# Altium PCB V2.pcbdoc
Units mil, origin at the board's own origin, x right, y up, seen from the top; angles counter-clockwise.
Board outline 2427.79 x 2060 mil, 2 copper layers (Top Layer, Bottom Layer); 55 components, 64 nets, 197 pads, 14 vias.
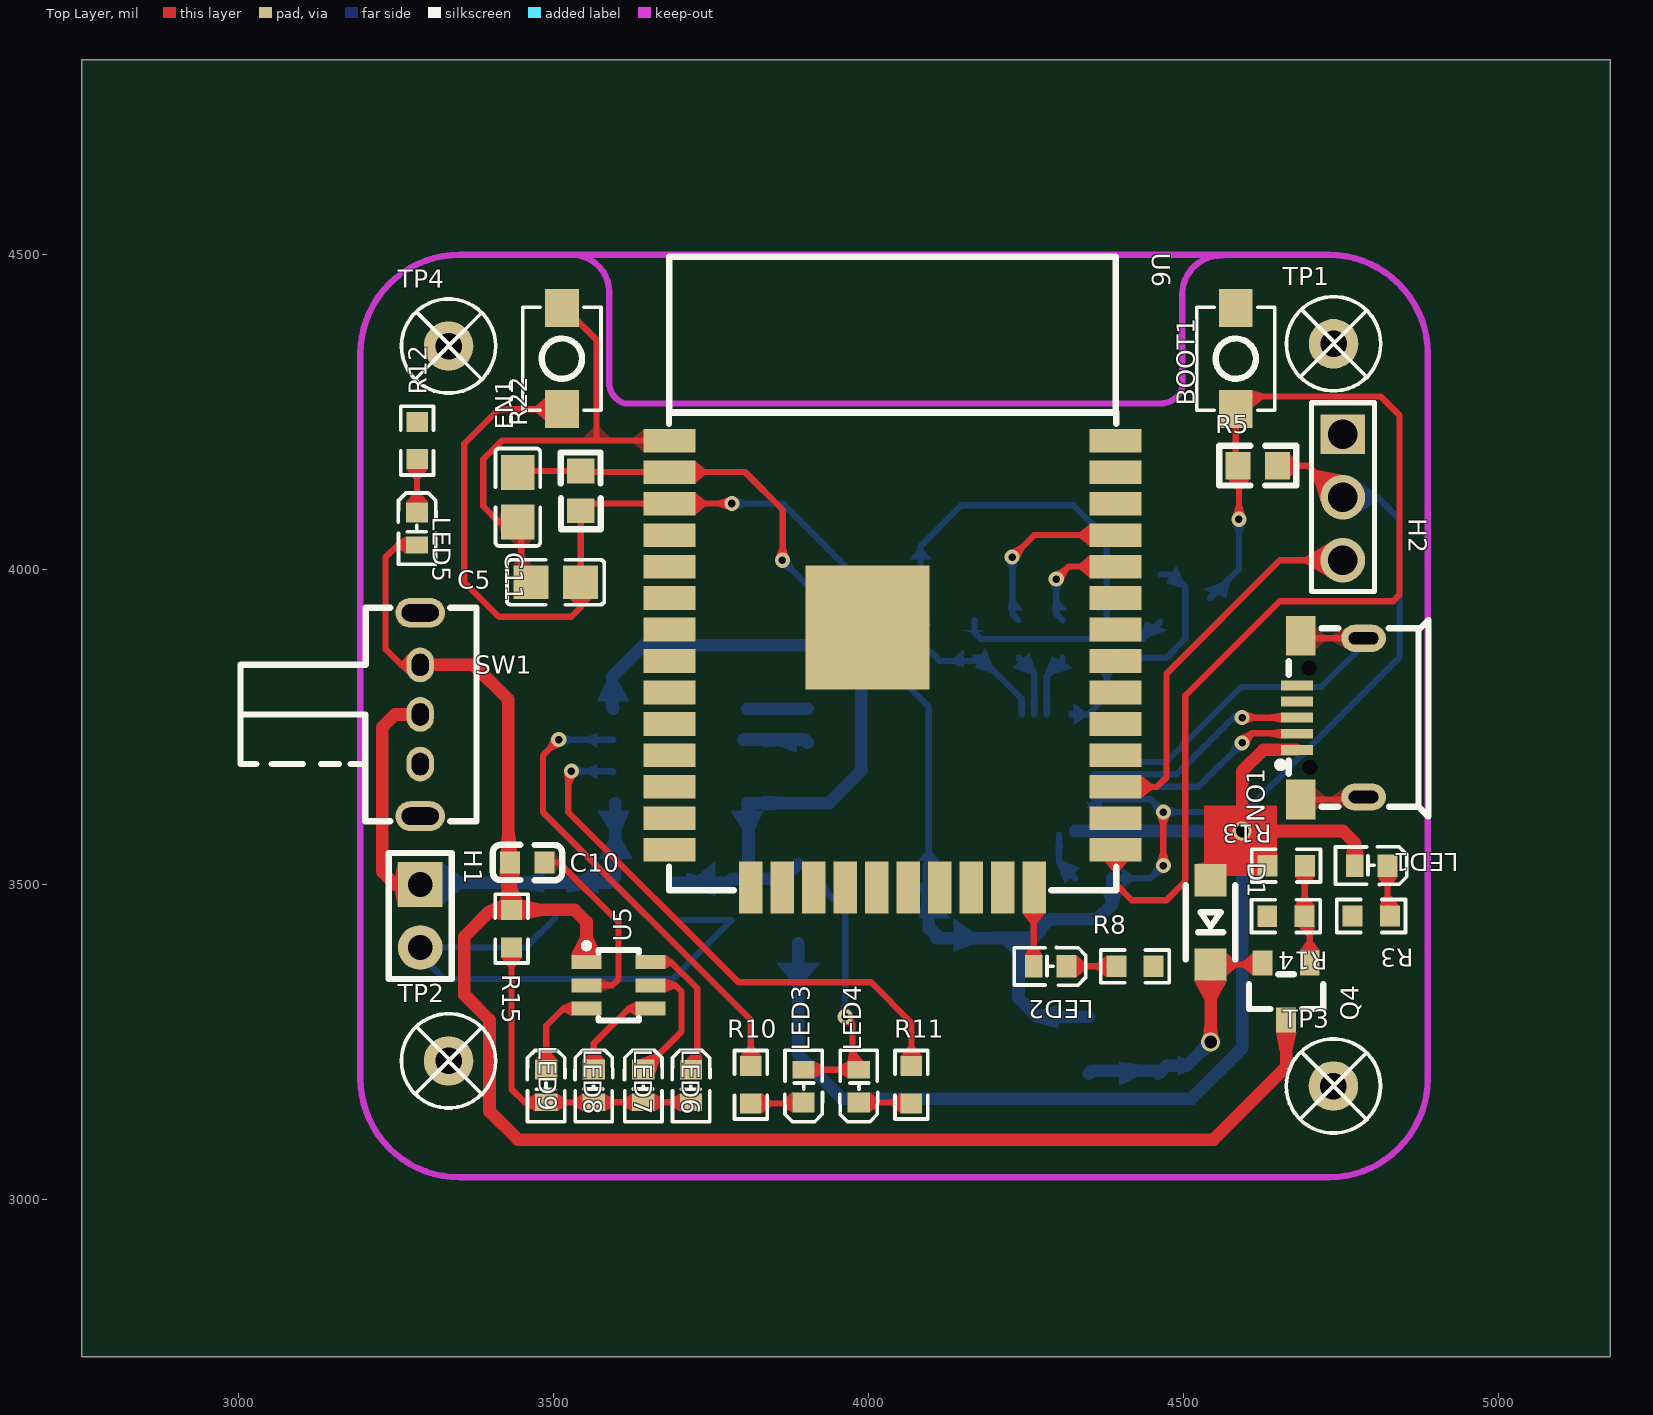
[diagram p0: Top Layer view]
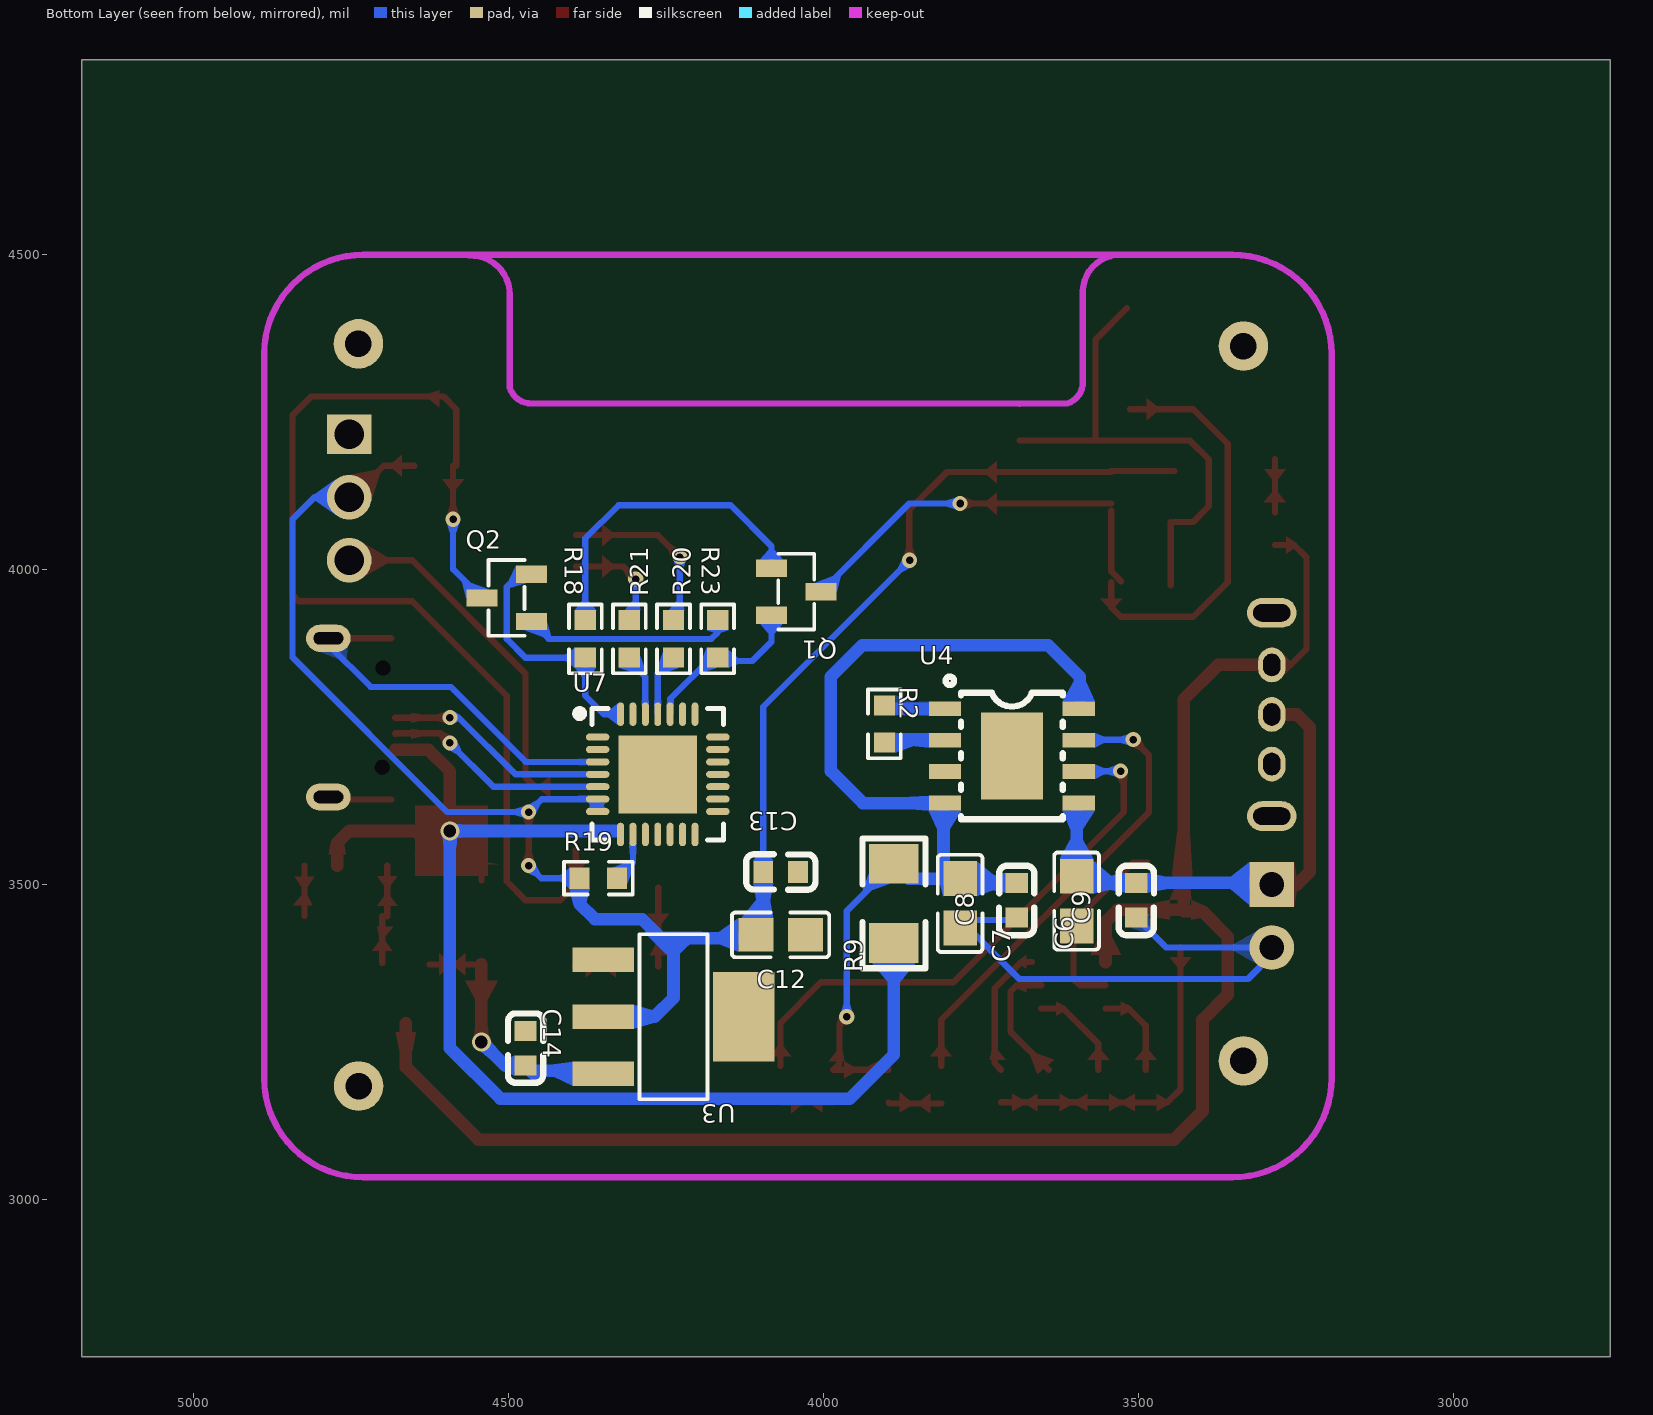
[diagram p1: Bottom Layer view, seen from below]

## Layer stack, top to bottom
Top Layer: signal copper (thickness not stored)
Dielectric: dielectric 12.6, FR-4, Dk 4.8
Bottom Layer: signal copper (thickness not stored)

## Board outline
5177.79,2750 2750,2750 2750,4810 5177.79,4810

## Components (designator, comment, footprint, x,y, rotation, side; value= is the part's Value field where it differs from the comment)
BOOT1 "TSA343G00-250J2" SW-SMD_L4.0-W2.9-LS5.0 4582.79,4335 r90 top
C5 "10uF" C0805 3502.79,3980 r0 top
C6 "104" C0603 3692.79,3475 r90 bottom
C7 "104" C0603 3502.79,3475 r90 bottom
C8 "10UF" C0805 3782.79,3470 r90 bottom
C9 "10UF" C0805 3597.79,3473.74 r90 bottom
C10 "1uF" C0603 3457.79,3535 r180 top
C11 "10uF" C0805 3442.79,4115 r270 top
C12 "10uF" C0805 4067.79,3420 r180 bottom
C13 "104" C0603 4067.79,3520 r0 bottom
C14 "104" C0603 4472.79,3240 r270 bottom
D1 "1N4148W" SOD-123FL_L2.6-W1.6-LS3.4-RD 4542.79,3440 r270 top
EN1 "TSA343G00-250J2" SW-SMD_L4.0-W2.9-LS5.0 3512.79,4335 r90 top
H1 "电源端口" HDR-TH_2P-P2.54-V-M-1 3287.79,3450 r270 top
H2 "Z-211-0311-0021-001" HDR-TH_3P-P2.54-V-M-1 4752.79,4115 r270 top
LED1 "LED-0603_R" LED0603-R-RD_BLUE-A 4797.79,3530 r180 top
LED2 "VLMTG1401-GS08" LED0603-R-RD_BLUE-A 4287.79,3370 r180 top
LED3 "红色" LED0603-R-RD_BLUE-A 3896.48,3180 r90 top
LED4 "绿色" LED0603-R-RD_BLUE-A 3984.11,3180 r90 top
LED5 "LED-0603_R" LED0603-R-RD_BLUE-A 3282.79,4065 r270 top
LED6 "LED-0603_R" LED0603-R-RD_BLUE-A 3717.79,3180 r270 top
LED7 "LED-0603_R" LED0603-R-RD_BLUE-A 3642.16,3180.05 r270 top
LED8 "LED-0603_R" LED0603-R-RD_BLUE-A 3563.41,3180.05 r270 top
LED9 "LED-0603_R" LED0603-R-RD_BLUE-A 3487.79,3180 r270 top
NO1 "MICROUSB-5PIN" USB-SMD_5P_MICROUSB-5PIN 4732.79,3765 r90 top
Q1 "S8050" SOT-23-3_L2.9-W1.3-P1.90-LS2.4-BR 4042.79,3965 r0 bottom
Q2 "S8050" SOT-23-3_L2.9-W1.3-P1.90-LS2.4-BR 4502.79,3955 r180 bottom
Q4 "AO3401A_P" AO3401A_SOT-23-3 4662.79,3330 r90 top
R2 "1.2K" R0603#1 3902.79,3755 r270 bottom
R3 "ERA3VEB1001V" R0603#1 4797.79,3450 r180 top
R5 "10k" R0603#2 4617.79,4165 r0 top
R8 "ERA3VEB1001V" R0603#1 4422.79,3370 r0 top
R9 "250mR" R1206_1 3887.79,3470 r90 bottom
R10 "2K" R0603#1 3812.79,3182.06 r270 top
R11 "10k" R0603#1 4067.79,3182.06 r270 top
R12 "ERA3VEB1001V" R0603#1 3282.79,4205 r90 top
R13 "1k" R0603#1 4662.79,3530 r0 top
R14 "1k" R0603#1 4662.45,3449.66 r180 top
R15 "330" R0603#1 3432.79,3430 r270 top
R18 "ERJPB3B1002V" R0603#1 4377.79,3890 r270 bottom
R19 "TNPW06034K70BEEA" R0603#1 4357.11,3510 r180 bottom
R20 "ERA3VEB1001V" R0603#1 4237.79,3890 r90 bottom
R21 "ERA3VEB1001V" R0603#1 4307.79,3890 r90 bottom
R22 "10k" R0603#2 3542.79,4125 r90 top
R23 "ERJPB3B1002V" R0603#1 4167.79,3890 r270 bottom
SW1 "SK-12D02-VG5_C136722" SW-TH_SK-12D02-VG5 3287.79,3770 r270 top
TP1 "M2螺丝" M2螺丝 4738.07,4358.59 r0 top
TP2 "M2螺丝" M2螺丝 3332.79,3220 r0 top
TP3 "M2螺丝" M2螺丝 4737.79,3180 r0 top
TP4 "M2螺丝" M2螺丝 3332.79,4355 r0 top
U3 "AMS1117-3.3_C347256" SOT-223-4_L6.5-W3.5-P2.30-LS7.0-BR 4237.79,3290 r0 bottom
U4 "TP4056D" ESOP-8_L4.9-W3.9-P1.27-LS6.0-TL-EP 3700.55,3704.18 r180 bottom
U5 "HM1160" SOT23-6 3602.79,3340 r270 top
U6 "ESP32-WROOM-32D-N4_C473012" WIFIM-SMD_39P-L25.5-W18.0-P1.27-BL 4037.79,3850 r270 top
U7 "CP2102" QFN-28_L5.0-W5.0-P0.50-TL-EP3.2 4262.79,3675 r180 bottom

## Footprints (in the part's own frame and the unit in brackets; to place one, negate y for a bottom-side part, rotate by r counter-clockwise, add the part's x,y. Pads: shape width x height; smd on the part's side, far side on the other; paste and mask are expansions set on the pad)
AO3401A_SOT-23-3 [mm]
  rect 1x0.8 smd paste+0 mask+0.051: 1(1.15,-0.95) 2(1.15,0.95) 3(-1.15,0)
  silkscreen extent -0.7,-1.5 0.7,1.5
C0603 [mm]
  rect 0.8x0.9 smd paste+0 mask+0.051: 1(-0.7,0) 2(0.7,0)
  silkscreen extent -1.41,-0.71 1.39,0.72
C0805 [mm]
  rect 1.41x1.35 smd paste-100 mask+0.051: 1(-1,0) 2(1,0)
  silkscreen extent -1.96,-0.9 1.96,0.9
ESOP-8_L4.9-W3.9-P1.27-LS6.0-TL-EP [mm]
  rect 1.3x0.6 smd paste+0 mask+0.051: 1(-2.7,1.905) 2(-2.7,0.635) 3(-2.7,-0.635) 4(-2.7,-1.905) 5(2.7,-1.905) 6(2.7,-0.635) 7(2.7,0.635) 8(2.7,1.905)
  rect 2.5x3.5 smd paste+0 mask+0.051: 9(0,0)
  silkscreen extent -2.67,-2.55 2.05,3.2
HDR-TH_2P-P2.54-V-M-1 [mm]
  rect 1.8x1.8 hole 1 paste+0 mask+0.051: 1(-1.27,0)
  round 1.8 hole 1 paste+0 mask+0.051: 2(1.27,0)
  silkscreen extent -2.54,-1.27 2.54,1.27
HDR-TH_3P-P2.54-V-M-1 [mm]
  rect 1.575x1.8 hole 1.2 paste+0 mask+0.051: 1(-2.54,0)
  round 1.8 hole 1.2 paste+0 mask+0.051: 2(0,0) 3(2.54,0)
  silkscreen extent -3.81,-1.27 3.81,1.27
LED0603-R-RD_BLUE-A [mm]
  rect 0.7x0.9 smd paste+0 mask+0.051: 1(0.66,0)
  rect 0.8x0.9 smd paste+0 mask+0.051: 2(-0.66,0)
  silkscreen extent -1.44,-0.76 1.44,0.76
M2螺丝 [mm]
  round 2 hole 1.07 mask+0.051: 1(0,0)
  silkscreen extent -1.9,-1.9 1.9,1.9
QFN-28_L5.0-W5.0-P0.50-TL-EP3.2 [mm]
  oval 0.95x0.28 smd paste-100 mask+0.051: 1(-2.425,1.501) 2(-2.425,1.001) 3(-2.425,0.501) 4(-2.425,0) 5(-2.425,-0.5) 6(-2.425,-1.001) 7(-2.425,-1.501) 15(2.425,-1.501) 16(2.425,-1.001) 17(2.425,-0.5) 18(2.425,0) 19(2.425,0.501) 20(2.425,1.001) 21(2.425,1.501)
  oval 0.28x0.95 smd paste-100 mask+0.051: 8(-1.501,-2.425) 9(-1.001,-2.425) 10(-0.501,-2.425) 11(0,-2.425) 12(0.5,-2.425) 13(1.001,-2.425) 14(1.501,-2.425) 22(1.501,2.425) 23(1.001,2.425) 24(0.5,2.425) 25(0,2.425) 26(-0.501,2.425) 27(-1.001,2.425) 28(-1.501,2.425)
  rect 3.15x3.15 smd paste-100 mask+0.051: 29(0,0)
  silkscreen extent -3.3,-2.65 2.65,2.65
R0603#1 [mil]
  rect 31.75x34.02 smd paste-3937.01 mask+2: 1(-29.66,0) 2(29.66,0)
  silkscreen extent -55,-26 55,26
R0603#2 [mil]
  rect 39.37x43.31 smd paste+0 mask+4: 1(-31.49,0) 2(31.5,0)
  silkscreen extent -61,-31 61,32
R1206_1 [mil]
  rect 63x78.74 smd paste+0 mask+1.97: 1(-62.99,0) 2(62.99,0)
  silkscreen extent -103,-50 103,50
SOD-123FL_L2.6-W1.6-LS3.4-RD [mm]
  rect 1.3x1.3 smd paste+0 mask+0.051: 1(1.7,0) 2(-1.7,0)
  silkscreen extent -1.5,-1 1.5,1
SOT23-6 [mil]
  rect 22.2x47.7 smd paste+0 mask+2: 1(-37,-51) 2(0,-51) 3(37,-51) 4(37,51) 5(0,51) 6(-37,51)
  silkscreen extent -67,-55 56,32
SOT-23-3_L2.9-W1.3-P1.90-LS2.4-BR [mm]
  rect 1.25x0.7 smd paste+0 mask+0.051: 1(1,-0.95) 2(1,0.95) 3(-1,0)
  silkscreen extent -0.73,-1.53 0.73,1.53
SOT-223-4_L6.5-W3.5-P2.30-LS7.0-BR [mm]
  rect 2.47x0.98 smd paste+0 mask+0.051: 1(2.835,-2.3) 2(2.835,0) 3(2.835,2.3)
  rect 2.47x3.6 smd paste+0 mask+0.051: 4(-2.835,0)
  silkscreen extent -1.37,-3.33 1.37,3.33
SW-SMD_L4.0-W2.9-LS5.0 [mm]
  rect 1.53x1.36 smd paste+0 mask+0.051: 1(-2.035,0) 2(2.035,0)
  silkscreen extent -2.08,-1.58 2.08,1.58
SW-TH_SK-12D02-VG5 [mm]
  oval 1.4x1.1 hole 0.7 slot 0.9 at 0 deg copper offset 0.001,0 paste+0 mask+0.051: 1(-2,-0.001)
  oval 1.4x1.1 hole 0.7 slot 0.9 at 0 deg paste+0 mask+0.051: 2(0,0)
  oval 1.4x1.1 hole 0.7 slot 0.9 at 0 deg copper offset -0.001,0 paste+0 mask+0.051: 3(2,0.001)
  oval 1.2x2 hole 0.7 slot 1.5 at 90 deg copper offset 0,-0.001 paste+0 mask+0.051: 4(4.099,0)
  oval 1.2x2 hole 0.7 slot 1.5 at 90 deg copper offset 0,0 paste+0 mask+0.051: 5(-4.1,0)
  silkscreen extent -4.3,-7.25 4.3,2.27
USB-SMD_5P_MICROUSB-5PIN [mm]
  rect 0.4x1.3 smd paste-100 mask+0.05: 1(-1.3,1.345) 2(-0.65,1.345) 3(0,1.345) 4(0.65,1.345) 5(1.3,1.345)
  rect 1.6x1.2 smd paste-100 mask+0.05: 6(3.3,1.185) 7(-3.3,1.185)
  oval 1.1x1.8 hole 0.5 slot 1.2 at 90 deg paste+0 mask+0.05: 8(3.2,-1.345) 9(-3.2,-1.345)
  Multi-Layer board cut-out: 2,0.555 2.13,0.585 2.235,0.668 2.292,0.788 2.292,0.922 2.235,1.042 2.13,1.125 2,1.155 2,1.155 1.87,1.125 1.765,1.042 1.708,0.922 1.708,0.788 1.765,0.668 1.87,0.585 2,0.555
  Multi-Layer board cut-out: -2,0.525 -1.87,0.555 -1.765,0.638 -1.708,0.758 -1.708,0.892 -1.765,1.012 -1.87,1.095 -2,1.125 -2,1.125 -2.13,1.095 -2.235,1.012 -2.292,0.892 -2.292,0.758 -2.235,0.638 -2.13,0.555 -2,0.525
  silkscreen extent -3.99,-3.96 3.93,2.14
WIFIM-SMD_39P-L25.5-W18.0-P1.27-BL [mm]
  rect 0.95x2.1 smd paste+0 mask+0.051: 1(-9.015,-9) 2(-7.745,-9) 3(-6.475,-9) 4(-5.205,-9) 5(-3.935,-9) 6(-2.665,-9) 7(-1.395,-9) 8(-0.125,-9) 9(1.145,-9) 10(2.415,-9) 11(3.685,-9) 12(4.955,-9) 13(6.225,-9) 14(7.495,-9) 25(7.495,9) 26(6.225,9) 27(4.955,9) 28(3.685,9) 29(2.415,9) 30(1.145,9) 31(-0.125,9) 32(-1.395,9) 33(-2.665,9) 34(-3.935,9) 35(-5.205,9) 36(-6.475,9) 37(-7.745,9) 38(-9.015,9)
  rect 2.1x0.95 smd paste+0 mask+0.051: 15(9.015,-5.715) 16(9.015,-4.445) 17(9.015,-3.175) 18(9.015,-1.905) 19(9.015,-0.635) 20(9.015,0.635) 21(9.015,1.905) 22(9.015,3.175) 23(9.015,4.445) 24(9.015,5.715)
  rect 5x5 smd paste+0 mask+0.051: 39(-1.472,-1.017)
  silkscreen extent -16.44,-9.02 9.12,9.02

## Via types
v1: diameter 24, hole 12, Top Layer to Bottom Layer, 10 vias
v2: diameter 24.02, hole 12.01, Top Layer to Bottom Layer, 2 vias
v3: diameter 30, hole 20, Top Layer to Bottom Layer, 2 vias

## Nets (pads, with @x,y where several pads share a name; then routed paths per layer and width w, separated by ;. In a path a pad name is that pad's centre, name@x,y a point inside that pad or via, vN(x,y) a via of type N, cw(c..) or ccw(c..) an arc to the next point about the centre after c; other vN are vias at no path point)
3V3: C11.1 C12.1 C13.2 H2.2 R5.2 R19.1 R22.2 U3.2 U6.2 U7.6 U7.7 | length 3011.6
  Top Layer w10: C11.1@3442.79,4156.5 R22.2 ; R22.2@3542.79,4154.93 U6.2 ; U6.2@3683.47,4155 3803.47,4155 3863.47,4095 3863.47,4015.68 v1(3862.79,4015) ; v1(4467.79,3530) v1(4467.79,3615) ; R5.2 4697.79,4165 H2.2@4747.79,4115
  Bottom Layer w10: v1(3862.79,4015) 4095.35,3782.44 C13.2@4095.35,3530 ; U7.6 U7.6@4363.27,3635.61 ; U7.7@4363.27,3615.91 U7.6@4363.27,3635.61 ; R19.1 4447.79,3510 v1(4467.79,3530) ; H2.2 4807.79,4115 4842.79,4080 4842.79,3860.98 4596.81,3615 v1(4467.79,3615) 4447.19,3635.61 U7.6@4363.27,3635.61
  Bottom Layer w20: C12.1@4095.35,3430 C13.2 C13.2@4095.35,3530 ; C12.1@4097.16,3430 C12.1 ; C12.1@4107.16,3415 4217.79,3415 4237.79,3395 ; U3.2 4267.79,3290 4237.79,3320 4237.79,3395 ; R19.1 4386.77,3468.98 4362.79,3445 4287.79,3445 4237.79,3395
$2N349: R2.2 U4.2 | length 103
  Bottom Layer w20: U4.2@3801.84,3730.34 3897.79,3730.34 R2.2
$2N379: R10.1 U4.7 | length 751.8
  Top Layer w10: v1(3507.79,3730) 3482.79,3705 3482.79,3615 3812.79,3285 R10.1
  Bottom Layer w10: v1(3507.79,3730) U4.7@3594.25,3730
$2N380: R11.1 U4.6 | length 886.3
  Top Layer w10: v1(3527.79,3680) 3522.79,3675 3522.79,3615 3793.2,3344.6 4003.78,3344.6 4067.79,3280.59 R11.1
  Bottom Layer w10: v1(3527.79,3680) 3593.43,3680 U4.6
$2N662: Q4.1 R13.2 R14.1 | length 154.7
  Top Layer w10: R14.1@4692.45,3449.66 R13.2 ; Q4.1 R14.1@4700.19,3449.66
$2N691: LED9.2 U5.3 | length 145.2
  Top Layer w10: LED9.2 3487.79,3275.99 3514.8,3303 U5.3
$2N692: LED8.2 U5.4 | length 154.9
  Top Layer w10: LED8.2 3563.41,3247.62 3618.79,3303 U5.4
$2N693: LED7.2 U5.5 | length 202.2
  Top Layer w10: LED7.2 3702.79,3266.67 3702.79,3330 3692.8,3340 U5.5
$2N694: LED6.2 U5.6 | length 209.6
  Top Layer w10: U5.6@3668.79,3377 3685.8,3377 3727.79,3335 3727.79,3215.99 LED6.2
$2N695: LED6.1 LED7.1 LED8.1 LED9.1 R15.2 | length 519
  Top Layer w10: R15.2 3432.79,3175 3453.78,3154.01 LED9.1 LED8.1@3563.41,3154.01 ; LED8.1 LED7.1 LED6.1@3717.79,3154.07
$2N937: LED3.2 R10.2 | length 84.4
  Top Layer w10: R10.2 3894.86,3152.4 LED3.2
$2N938: LED4.2 R11.2 | length 83.7
  Top Layer w10: LED4.2 R11.2@4067.79,3154.01
$2N941: LED5.2 R12.1 | length 84.4
  Top Layer w10: LED5.2 R12.1
$2N949: Q1.1 R18.1 | length 509.4
  Bottom Layer w10: Q1.1 4082.16,4037.4 4147.16,4102.4 4325.05,4102.4 4377.79,4049.66 R18.1
$2N2531: LED2.2 R8.1 | length 79.4
  Top Layer w10: LED2.2 R8.1
$2N2543: LED1.2 R3.1 | length 80
  Top Layer w10: R3.1@4823.78,3450 LED1.2
$2N14500: R19.2 U7.9 | length 80
  Bottom Layer w10: U7.9 4302.2,3535.26 R19.2
$2N14521: R20.1 U7.25 | length 100.2
  Bottom Layer w10: R20.1 4262.8,3835.34 U7.25
$2N14556: R21.1 U7.26 | length 100.2
  Bottom Layer w10: U7.26@4282.79,3770.47 4282.79,3830 4307.79,3855 R21.1
$2N29907: Q2.1 R23.1 | length 330.9
  Bottom Layer w10: R23.1 4167.79,3900 4177.79,3890 4435.82,3890 Q2.1
+5V: D1.2 LED1.1 NO1.1 R9.1 R13.1 U7.8 | length 2168.3
  Top Layer w10: D1.2 D1.2@4542.79,3530
  Top Layer w20: NO1.1 4626.61,3713.82 4592.79,3680 v3(4592.79,3585) 4542.79,3535 4542.79,3530 R13.1 4633.13,3570.34 4647.79,3585 4752.79,3585 4771.81,3565.99 LED1.1
  Bottom Layer w20: R9.1 3887.79,3230 3957.79,3160 4512.79,3160 4592.79,3240 v3(4592.79,3585) 4327.79,3585
CLK: U6.20
CMD: U6.19
D+: NO1.3 U7.4 | length 358.9
  Top Layer w10: v2(4592.79,3765) NO1.3
  Bottom Layer w10: U7.4 4488.65,3675 4578.65,3765 v2(4592.79,3765)
D-: NO1.2 U7.5 | length 357.2
  Top Layer w10: v2(4592.79,3725) 4607.79,3740 4679.25,3740 NO1.2
  Bottom Layer w10: U7.5 4523.69,3655.3 4592.79,3724.41 v2(4592.79,3725)
DTR: Q2.2 R18.2 U7.28 | length 396
  Bottom Layer w10: U7.28 4348.27,3770.47 4377.79,3800 4377.79,3860 4472.79,3860 4502.79,3890 4502.79,3973.03 4483.42,3992.4 Q2.2
EN: C5.2 EN1.1 Q1.3 R22.1 U6.3 | length 1288.8
  Top Layer w10: EN1.1 3412.67,4254.88 3357.79,4200 3357.79,3980 3412.79,3925 3527.79,3925 3542.79,3940 C5.2@3542.79,3980 ; C5.2@3527.16,3981.55 3542.79,3997.18 R22.1 ; R22.1@3542.79,4104.93 U6.3 3782.72,4104.93 v1(3782.79,4105)
  Bottom Layer w10: v1(3782.79,4105) 3863.42,4105 Q1.3
GND: BOOT1.2 C5.1 C6.1 C7.1 C8.1 C9.1 C10.1 C11.2 C12.2 C13.1 C14.1 EN1.2 H1.2 H2.1 NO1.5 NO1.6 NO1.7 NO1.8 NO1.9 R2.1 R3.2 R8.2 R12.2 R14.2 U3.1 U4.1 U4.3 U4.9 U5.2 U6.1 U6.15 U6.38 U6.39 U7.3 | length 2896.9
  Top Layer w10: C11.2 3412.79,4075.63 3387.79,4100.63 3387.79,4175 3417.72,4204.93 U6.1 ; C5.1@3448.42,3975 C11.2@3448.42,4075.63 ; C10.1 3507.79,3535 3602.79,3440 3602.79,3350 3592.79,3340 U5.2 ; EN1.2@3517.79,4415.12 3567.79,4365.12 3567.79,4204.93 U6.1@3688.47,4204.93 ; NO1.7 NO1.9@4785.74,3635.08 ; NO1.6@4686.14,3890.99 NO1.8
  Bottom Layer w10: C7.1 3455.35,3400 H1.2 3287.79,3387.73 3325.52,3350 3688.99,3350 3782.79,3443.8 C6.1@3693.99,3443.8 ; U7.3 4472.5,3694.7 4591.56,3813.77 4718.52,3813.77 4785.74,3880.99 NO1.8
  Bottom Layer w20: U4.1 R2.1@3902.79,3779.18
IO0: BOOT1.1 Q2.3 R5.1 U6.25 | length 1773.5
  Top Layer w10: U6.25@4392.79,3554.93 4392.79,3500 4417.79,3475 4472.79,3475 4502.79,3505 4502.79,3800 4652.79,3950 4832.79,3950 4842.79,3960 4842.79,4245 4812.79,4275 4602.91,4275 BOOT1.1 R5.1@4582.79,4165 ; v1(4587.79,4080) R5.1@4587.79,4165
  Bottom Layer w10: Q2.3 4587.79,4000.63 v1(4587.79,4080)
IO2: LED2.1 U6.24 | length 125.1
  Top Layer w10: LED2.1 U6.24@4261.81,3495.09
IO4: U6.26
IO5: U6.29
IO12: U6.14
IO13: U6.16
IO14: U6.13
IO15: U6.23
IO16: H2.3 U6.27 | length 606.4
  Top Layer w10: U6.27@4392.12,3655 4457.79,3655 4472.79,3670 4472.79,3835 4652.79,4015 H2.3
IO17: U6.28
IO18: U6.30
IO19: U6.31
IO21: U6.33
IO22: U6.36
IO23: U6.37
IO25: U6.10
IO26: U6.11
IO27: U6.12
IO32: U6.8
IO33: U6.9
IO34: U6.6
IO35: U6.7
RTS: Q1.2 R23.2 U7.24 | length 266.9
  Bottom Layer w10: Q1.2 4082.16,3885.63 4112.79,3855 R23.2@4167.79,3855 ; R23.2 4177.45,3860.34 4242.79,3795 U7.24@4242.79,3770.47
RXD0: R21.2 U6.34 | length 172.1
  Top Layer w10: v1(4297.79,3985) 4317.79,4005 4392.04,4005 U6.34
  Bottom Layer w10: v1(4297.79,3985) 4297.79,3929.66 R21.2
SD0: U6.21
SD1: U6.22
SD2: U6.17
SD3: U6.18
TXD0: R20.2 U6.35 | length 283.3
  Top Layer w10: v1(4227.79,4020) 4262.72,4054.93 U6.35
  Bottom Layer w10: v1(4227.79,4020) 4227.79,3929.66 R20.2
VCC4: C6.2 C8.2 LED3.1 LED4.1 R9.2 U4.4 U4.8 | length 1625.9
  Top Layer w10: LED3.1 LED4.1 3974.11,3215.99 3974.11,3278.68 v1(3962.79,3290)
  Bottom Layer w10: R9.2 3962.79,3457.99 v1(3962.79,3290)
  Bottom Layer w20: U4.8 3592.79,3780.64 3592.79,3830 3642.79,3880 3937.79,3880 3987.79,3830 3987.79,3680 3936.97,3629.18 U4.4@3814,3629.18 ; C6.2 3775.98,3502.56 C8.2 3814,3509.37 ; U4.4 U4.4@3814,3629.18 ; R9.2 3864.17,3509.37 3814,3509.37 ; 3814,3509.37 3809,3514.37 3809,3624.18 U4.4@3814,3629.18
VCCBAT: C10.2 LED5.1 Q4.3 R15.1 SW1.1 U5.1 | length 2746.4
  Top Layer w10: LED5.1 3251.81,4039.01 3232.79,4020 3232.79,3873.74 3257.79,3848.74 SW1.1
  Top Layer w20: SW1.1 3372.79,3848.74 3427.79,3793.74 R15.1@3427.79,3457.56 ; U5.1 3551.79,3440.66 3532.79,3459.66 3502.79,3459.66 3429.89,3459.66 R15.1@3427.79,3457.56 ; Q4.3@4662.79,3279.72 4662.79,3210 4547.79,3095 3442.79,3095 3397.79,3140 3397.79,3285 3357.79,3325 3357.79,3417.28 3398.07,3457.56 R15.1@3427.79,3457.56
VCCCHARGE: C7.2 C9.2 H1.1 SW1.2 U4.5 | length 797
  Top Layer w20: H1.1 3247.79,3500 3227.79,3520 3227.79,3750 3247.78,3769.99 SW1.2
  Bottom Layer w20: H1.1@3287.79,3502.56 C7.2 3587.24,3502.56 C9.2 U4.5@3597.79,3629.18
VCCIN: C14.2 D1.1 Q4.2 U3.3 | length 424.1
  Top Layer w10: D1.1 Q4.2@4625.39,3373.07
  Top Layer w20: v3(4542.79,3250) D1.1
  Bottom Layer w20: U3.3 4354.4,3204.45 4454.8,3204.45 4459.8,3199.45 C14.2 4505.23,3212.44 v3(4542.79,3250)
VN: U6.5
VP: U6.4
"": NO1.4 SW1.3 SW1.4 SW1.5 TP1.1 TP2.1 TP3.1 TP4.1 U3.4 U6.32 U7.1 U7.2 U7.10 U7.11 U7.12 U7.13 U7.14 U7.15 U7.16 U7.17 U7.18 U7.19 U7.20 U7.21 U7.22 U7.23 U7.27 U7.29

## Polygon pours and split planes (outlines as drawn)
GND on Top Layer (solid, remove dead copper, pour order 0): 3127.79,3000 4927.79,3000 4927.79,4560 3127.79,4560
GND on Bottom Layer (solid, remove dead copper, pour order 1): 3127.79,3000 4927.79,3000 4927.79,4560 3127.79,4560

## Keep-outs
Board Outline Layer:
  lines w10 net "": 3527.79,4500 cw(c3528.12,4440.11) 3587.79,4435 ; 3587.79,4292.86 3587.79,4431.43 ; 3587.8,4298.7 ccw(c3623.63,4297.86) 3612.8,4263.7 ; 3688.46,4263.24 3688.93,4263.71 ; 4497.8,4436.32 cw(c4559.56,4437.02) 4562.8,4498.71 ; 4497.8,4438.71 4497.8,4288.71 cw(c4463.63,4299.54) 4462.8,4263.71 3688.93,4263.71 ; 3612.8,4263.7 3612.81,4263.71 ; 3612.81,4263.71 3688.93,4263.71 ; 3192.79,3192.48 ccw(c3350.27,3192.48) 3350.27,3035 4730.31,3035 ccw(c4730.31,3192.48) 4887.79,3192.48 4887.79,4342.52 ccw(c4730.31,4342.52) 4730.31,4500 3350.27,4500 ccw(c3350.27,4342.52) 3192.79,4342.52 3192.79,3192.48

## Other copper
Top Layer:
  region net +5V: 4532.79,3514.25 4647.49,3514.25 4647.49,3625.05 4532.79,3625.05
  region net +5V: 4781.81,3565.99 4761.81,3565.99 4758.03,3547.72 4785.59,3547.72
  region net $2N2543: 4828.78,3497.28 4839.52,3512.28 4808.03,3512.28 4818.78,3497.28
  region net IO2: 4256.81,3402.72 4248.03,3387.72 4275.59,3387.72 4266.81,3402.72
  region net $2N2531: 4344.52,3365 4344.52,3375 4329.52,3387.5 4329.52,3352.5
  region net 3V3: 4683.97,4160 4683.97,4170 4668.97,4182.5 4668.97,4147.5
  region net IO0: 4582.79,4128.35 4592.79,4128.35 4605.29,4143.35 4570.29,4143.35
  region net EN: 3537.79,3940 3547.79,3940 3560.29,3953.43 3525.29,3953.43
  region net D+: 4639.25,3770 4639.25,3760 4654.25,3757.13 4654.25,3772.87
  region net D-: 4639.25,3745 4639.25,3735 4654.25,3731.54 4654.25,3747.28
  region net $2N937: 3844.8,3147.4 3844.8,3157.4 3829.8,3168.28 3829.8,3136.52
  region net $2N379: 3807.79,3242.6 3795.78,3227.6 3829.8,3227.6 3817.79,3242.6
  region net VCC4: 3929.19,3210.99 3914.19,3219.76 3914.19,3192.21 3929.19,3200.99
  region net $2N937: 3863.76,3147.4 3878.76,3138.27 3878.76,3169.76 3863.76,3157.4
  region net $2N938: 4035.78,3159.01 4035.78,3149.01 4050.78,3136.52 4050.78,3168.28
  region net $2N380: 4062.79,3242.6 4050.78,3227.6 4084.8,3227.6 4072.79,3242.6
  region net VCC4: 3951.39,3210.99 3951.39,3200.99 3966.39,3192.21 3966.39,3219.76
  region net VCC4: 3979.11,3234.76 3969.11,3234.76 3966.39,3219.76 3991.61,3219.76
  region net $2N938: 4016.82,3159.01 4001.82,3169.76 4001.82,3138.27 4016.82,3149.01
  region net VCCCHARGE: 3247.79,3510 3247.79,3490 3252.36,3465 3252.36,3535
  region net $2N941: 3277.79,4144.46 3287.79,4144.46 3299.8,4159.46 3265.78,4159.46
  region net VCCBAT: 3251.81,4044.01 3251.81,4034.01 3265.08,4025.24 3265.08,4052.79
  region net $2N941: 3277.79,4121.73 3265.29,4106.73 3300.29,4106.73 3287.79,4121.73
  region net +5V: 4552.79,3535 4532.79,3535 4517.2,3532.52 4568.38,3532.52
  region net VCCIN: 4552.79,3317.48 4568.38,3347.48 4517.2,3347.48 4532.79,3317.48
  region net VCCIN: 4583.38,3378.07 4568.38,3390.57 4568.38,3355.57 4583.38,3368.07
  region net $2N662: 4697.45,3497.99 4708.33,3512.99 4676.58,3512.99 4687.45,3497.99
  region net +5V: 4587.26,3520 4617.26,3512.99 4617.26,3547.01 4587.26,3540
  region net +5V: 4623.13,3570.34 4617.26,3547.01 4649.01,3547.01 4643.13,3570.34
  region net $2N662: 4697.45,3481.67 4687.45,3481.67 4676.24,3466.67 4707.99,3466.67
  region net $2N662: 4695.19,3417.65 4705.19,3417.65 4707.99,3432.65 4682.69,3432.65
  region net VCCBAT: 3437.79,3582.72 3417.79,3582.72 3414.48,3517.28 3445.98,3517.28
  region net VCCBAT: 3437.79,3487.28 3445.98,3517.28 3414.48,3517.28 3417.79,3487.28
  region net VCCBAT: 3561.79,3418.1 3541.79,3418.1 3527.94,3388.1 3575.64,3388.1
  region net $2N691: 3514.8,3308 3514.8,3298 3527.94,3291.9 3527.94,3314.1
  region net $2N692: 3618.79,3298 3629.94,3291.9 3629.94,3314.1 3618.79,3308
  region net $2N694: 3685.8,3372 3685.8,3382 3677.64,3388.1 3677.64,3365.9
  region net $2N693: 3692.64,3335 3692.64,3345 3677.64,3351.1 3677.64,3328.9
  region net $2N695: 3437.79,3369.46 3449.8,3384.46 3415.78,3384.46 3427.79,3369.46
  region net VCCBAT: 3437.79,3505.54 3417.79,3505.54 3415.78,3475.54 3449.8,3475.54
  region net VCCBAT: 3479.8,3449.66 3479.8,3469.66 3449.8,3475.54 3449.8,3443.78
  region net VCCBAT: 3398.07,3467.56 3398.07,3447.56 3415.78,3443.78 3415.78,3475.54
  region net IO16: 4729.35,4041.57 4692.55,4020 4692.55,4010 4729.35,3988.43
  region net 3V3: 4751.47,4150.41 4710.92,4158.95 4704.55,4151.17 4717.83,4109.26
  region net $2N695: 3685.08,3159.07 3685.08,3149.07 3700.08,3140.24 3700.08,3167.79
  region net $2N694: 3722.79,3236.73 3710.29,3221.73 3735.51,3221.73 3732.79,3236.73
  region net $2N695: 3674.87,3159.07 3659.87,3167.85 3659.87,3140.29 3674.87,3149.07
  region net $2N695: 3609.44,3159.07 3609.44,3149.07 3624.44,3140.29 3624.44,3167.85
  region net $2N693: 3661.44,3232.39 3633.15,3221.79 3659.87,3199 3670.48,3227.29
  region net $2N695: 3530.7,3159.01 3530.7,3149.01 3545.7,3140.29 3545.7,3167.85
  region net $2N695: 3596.13,3159.07 3581.13,3167.85 3581.13,3140.29 3596.13,3149.07
  region net $2N692: 3568.41,3236.79 3558.41,3236.79 3545.91,3221.79 3580.91,3221.79
  region net $2N695: 3455.08,3159.01 3455.08,3149.01 3470.08,3140.24 3470.08,3167.79
  region net $2N695: 3520.51,3159.01 3505.51,3167.79 3505.51,3140.24 3520.51,3149.01
  region net $2N691: 3482.79,3236.73 3470.29,3221.73 3505.29,3221.73 3492.79,3236.73
  region net VCCBAT: 3257.79,3843.74 3269.5,3831.24 3269.5,3866.24 3257.79,3853.74
  region net VCCBAT: 3339.05,3838.74 3339.05,3858.74 3309.44,3854.64 3309.44,3842.83
  region net VCCCHARGE: 3247.78,3759.99 3266.14,3764.08 3266.14,3775.89 3247.78,3779.99
  region net 3V3: 3739.8,4150 3739.8,4160 3724.8,4172.5 3724.8,4137.5
  region net EN: 3739.8,4099.93 3739.8,4109.93 3724.8,4122.43 3724.8,4087.43
  region net IO2: 4256.81,3438.75 4266.81,3438.75 4279.31,3453.75 4244.31,3453.75
  region net IO0: 4397.79,3521.22 4410.29,3536.22 4375.29,3536.22 4387.79,3521.22
  region net IO16: 4448.45,3650 4448.45,3660 4433.45,3672.5 4433.45,3637.5
  region net RXD0: 4335.78,4010 4335.78,4000 4350.78,3987.5 4350.78,4022.5
  region net TXD0: 4335.78,4059.93 4335.78,4049.93 4350.78,4037.43 4350.78,4072.43
  region net VCCIN: 4594.64,3378.07 4594.64,3368.07 4609.64,3355.59 4609.64,3390.57
  region net VCCBAT: 4672.79,3235.04 4678.54,3265.04 4647.04,3265.04 4652.79,3235.04
  region net $2N662: 4695.19,3409.96 4684.44,3394.96 4715.94,3394.96 4705.19,3409.96
  region net EN: 3471.02,4249.88 3486.02,4237.38 3486.02,4272.38 3471.02,4259.88
  region net IO0: 4624.56,4270 4624.56,4280 4609.56,4285 4609.56,4257.5
  region net $2N2543: 4828.78,3482.01 4818.78,3482.01 4811.58,3467.01 4841.28,3467.01
  region net $2N2531: 4362.26,3365 4377.26,3352.99 4377.26,3387.01 4362.26,3375
  region net D+: 4600.73,3755.99 4613.2,3760 4613.2,3770 4600.73,3774.01
  region net D-: 4604.78,3724.25 4610.76,3735.9 4603.69,3742.97 4592.04,3736.98
  region net VCCIN: 4554.04,3259.92 4552.79,3275.5 4532.79,3275.5 4531.54,3259.92
  region net +5V: 4577.82,3585.94 4567.69,3574.04 4581.83,3559.9 4593.73,3570.03
  region net +5V: 4604.04,3594.92 4602.79,3610.5 4582.79,3610.5 4581.54,3594.92
  region net 3V3: 4458.79,3607.06 4462.79,3594.6 4472.79,3594.6 4476.79,3607.06
  region net 3V3: 4476.79,3537.94 4472.79,3550.4 4462.79,3550.4 4458.79,3537.94
  region net 3V3: 3872.22,4022.42 3868.47,4035.11 3858.47,4035.68 3854.25,4023.43
  region net TXD0: 4239.77,4019.25 4245.75,4030.89 4238.68,4037.96 4227.04,4031.98
  region net RXD0: 4309.77,3984.25 4315.75,3995.89 4308.68,4002.96 4297.04,3996.98
  region net EN: 3774.8,4113.95 3762.36,4109.93 3762.42,4099.93 3774.91,4095.95
  region net IO0: 4596.79,4087.94 4592.79,4100.4 4582.79,4100.4 4578.79,4087.94
  region net $2N380: 3516.3,3676.53 3517.79,3662.14 3527.79,3657.56 3532.67,3669.03
  region net $2N379: 3495.81,3730.75 3489.83,3719.11 3496.9,3712.04 3508.54,3718.02
  region net VCC4: 3962.04,3278.02 3970.57,3275.15 3977.64,3282.22 3974.77,3290.75
Bottom Layer:
  region net 3V3: 4227.79,3390 4202.79,3415 4202.71,3415 4208.66,3420.95 4281.09,3420.95 4250.14,3390 4230.79,3390
  region net 3V3: 4227.79,3390 4192.79,3425 4282.79,3425 4250.14,3392.35 4250.14,3390
  region net 3V3: 4270.78,3280 4300.78,3270.71 4300.78,3309.29 4270.78,3300
  region net VCCIN: 4428.02,3194.45 4428.02,3214.45 4398.02,3218.74 4398.02,3180.16
  region net $2N349: 3862.43,3720.34 3862.43,3740.34 3832.43,3740.99 3832.43,3717.37
  region net VCC4: 3799,3587.37 3819,3587.37 3832.43,3617.37 3781.25,3617.37
  region net VCC4: 3862.43,3619.18 3862.43,3639.18 3832.43,3640.99 3832.43,3617.37
  region net VCCCHARGE: 3587.79,3587.37 3607.79,3587.37 3619.84,3617.37 3568.66,3617.37
  region net $2N380: 3553.66,3675 3568.66,3667.37 3568.66,3690.99 3553.66,3685
  region net $2N379: 3553.66,3735 3553.66,3725 3568.66,3717.37 3568.66,3740.99
  region net VCC4: 3582.79,3820.99 3568.66,3790.99 3619.84,3790.99 3602.79,3820.99
  region net $2N349: 3855.78,3720.34 3885.78,3709.46 3885.78,3741.22 3855.78,3740.34
  region net +5V: 3897.79,3345.51 3922.79,3375.51 3852.79,3375.51 3877.79,3345.51
  region net VCC4: 3922.83,3490.88 3936.97,3490.88 3927.16,3518.37 3894.54,3501.49
  region net VCC4: 3740.51,3492.56 3740.51,3512.56 3710.51,3518.31 3710.51,3486.81
  region net VCCCHARGE: 3550.51,3492.56 3550.51,3512.56 3520.51,3518.31 3520.51,3486.81
  region net VCCCHARGE: 3455.07,3492.56 3485.07,3486.81 3485.07,3518.31 3455.07,3512.56
  region net VCC4: 3726.22,3492.56 3756.22,3481.61 3756.22,3537.13 3726.22,3512.56
  region net VCC4: 3814,3499.37 3814,3519.37 3809.37,3537.13 3809.37,3481.61
  region net VCCCHARGE: 3541.22,3492.56 3571.22,3485.35 3571.22,3537.56 3541.22,3512.56
  region net VCCCHARGE: 3587.79,3570.87 3571.22,3540.87 3624.37,3540.87 3607.79,3570.87
  region net VCCCHARGE: 3353.22,3492.56 3353.22,3512.56 3323.22,3535.43 3323.22,3467.56
  region net 3V3: 4776.23,4088.43 4807.79,4110 4807.79,4120 4776.23,4141.57
  region net $2N29907: 4446.11,3893.21 4474.39,3903.82 4438.81,3917.74 4432.29,3893.54
  region net DTR: 4498.63,3984.26 4488.03,4006.18 4472.45,3978.62 4498.63,3970.12
  region net IO0: 4573.62,3979.39 4559.48,3979.39 4531.19,3968.78 4566.77,3954.86
  region net $2N949: 4077.16,4031.18 4064.66,4016.18 4099.66,4016.18 4087.16,4031.18
  region net RTS: 4087.16,3898.82 4099.66,3913.82 4064.66,3913.82 4077.16,3898.82
  region net EN: 3971.96,3989.39 3978.81,3964.86 4014.39,3978.78 3986.11,3989.39
  region net D+: 4388.76,3670 4388.79,3680 4371.45,3680.52 4371.45,3669.49
  region net D-: 4388.77,3650.3 4388.77,3660.3 4371.45,3660.82 4371.45,3649.79
  region net 3V3: 4358.27,3615.91 4368.27,3615.91 4371.45,3630.09 4345.77,3630.09
  region net 3V3: 4388.77,3640.61 4371.45,3641.12 4371.45,3630.09 4388.77,3630.61
  region net 3V3: 4358.27,3635.61 4345.77,3621.42 4371.45,3621.42 4368.27,3635.61
  region net $2N14500: 4297.2,3549.02 4307.2,3549.02 4307.71,3566.34 4296.68,3566.34
  region net RTS: 4247.79,3795 4237.79,3795 4237.58,3783.66 4248.61,3783.66
  region net $2N14521: 4267.8,3800.98 4257.8,3800.98 4257.28,3783.66 4268.31,3783.66
  region net $2N14556: 4287.79,3800.2 4277.79,3801.54 4276.98,3783.66 4288.01,3783.66
  region net DTR: 4342.41,3775.47 4325.33,3787.97 4325.33,3752.97 4342.41,3765.47
  region net $2N14500: 4300.97,3529.41 4311.58,3501.13 4335.19,3527.01 4306.91,3537.61
  region net 3V3: 4376.77,3468.98 4396.77,3468.98 4402.65,3492.99 4370.9,3492.99
  region net 3V3: 4417.65,3515 4402.65,3527.01 4402.65,3492.99 4417.65,3505
  region net TXD0: 4232.79,3950.54 4222.79,3950.54 4220.78,3935.54 4245.29,3935.54
  region net $2N14521: 4265.41,3839.8 4254.8,3868.08 4228.92,3844.46 4257.2,3833.86
  region net RXD0: 4302.79,3950.54 4292.79,3950.54 4290.78,3935.54 4315.29,3935.54
  region net $2N14556: 4293.72,3833.86 4324.8,3844.46 4290.78,3862.74 4280.18,3834.46
  region net 3V3: 4085.35,3476.57 4079.41,3446.57 4130.35,3446.57 4105.35,3476.57
  region net 3V3: 4164.92,3405 4164.92,3425 4134.92,3446.57 4134.92,3393.43
  region net 3V3: 4085.35,3472.28 4105.35,3472.28 4111.1,3502.28 4079.6,3502.28
  region net 3V3: 4090.35,3552.72 4079.6,3537.72 4111.1,3537.72 4100.35,3552.72
  region net VCCIN: 4505.23,3202.44 4505.23,3222.44 4490.51,3228.19 4490.51,3196.69
  region net DTR: 4372.79,3829.46 4382.79,3829.46 4394.8,3844.46 4360.78,3844.46
  region net DTR: 4409.8,3855 4409.8,3865 4394.8,3876.22 4394.8,3844.46
  region net $2N949: 4382.79,3950.54 4372.79,3950.54 4360.78,3935.54 4394.8,3935.54
  region net RTS: 4195.41,3849.46 4184.8,3876.22 4168.58,3844.46 4195.41,3835.31
  region net RTS: 4135.78,3860 4135.78,3850 4150.78,3844.46 4150.78,3872.5
  region net $2N29907: 4162.79,3900 4172.79,3900 4184.8,3903.78 4150.78,3903.78
  region net D+: 4584.85,3774.01 4578.65,3770 4578.65,3760 4584.85,3755.99
  region net D-: 4580.79,3725.34 4574.99,3713.68 4582.31,3706.86 4593.96,3713.05
  region net VCCIN: 4527.82,3250.94 4517.69,3239.04 4531.83,3224.9 4543.73,3235.03
  region net +5V: 4582.87,3596.25 4567.29,3595 4567.29,3575 4582.87,3573.75
  region net +5V: 4581.54,3575.08 4582.79,3559.5 4602.79,3559.5 4604.04,3575.08
  region net 3V3: 4468.54,3626.98 4456.9,3632.96 4449.83,3625.89 4455.81,3614.25
  region net 3V3: 4475.73,3606 4488.19,3610 4488.19,3620 4475.73,3624
  region net 3V3: 4455.81,3530.75 4449.83,3519.11 4456.9,3512.04 4468.54,3518.02
  region net 3V3: 3862.04,4003.02 3873.68,3997.04 3880.75,4004.11 3874.77,4015.75
  region net TXD0: 4218.79,4012.06 4222.79,3999.6 4232.79,3999.6 4236.79,4012.06
  region net RXD0: 4288.79,3977.06 4292.79,3964.6 4302.79,3964.6 4306.79,3977.06
  region net EN: 3790.73,4096 3803.19,4100 3803.19,4110 3790.73,4114
  region net IO0: 4578.79,4072.06 4582.79,4059.6 4592.79,4059.6 4596.79,4072.06
  region net $2N380: 3535.73,3671 3548.19,3675 3548.19,3685 3535.73,3689
  region net $2N379: 3515.73,3721 3528.19,3725 3528.19,3735 3515.73,3739
  region net VCC4: 3971.79,3297.94 3967.79,3310.4 3957.79,3310.4 3953.79,3297.94